# Altium PCB NO2-CO PCB.PcbDoc
Units mil, origin at the board's own origin, x right, y up, seen from the top; angles counter-clockwise.
Board outline 1525 x 1175 mil, 2 copper layers (Top Layer, Bottom Layer); 18 components, 15 nets, 67 pads, 3 vias.
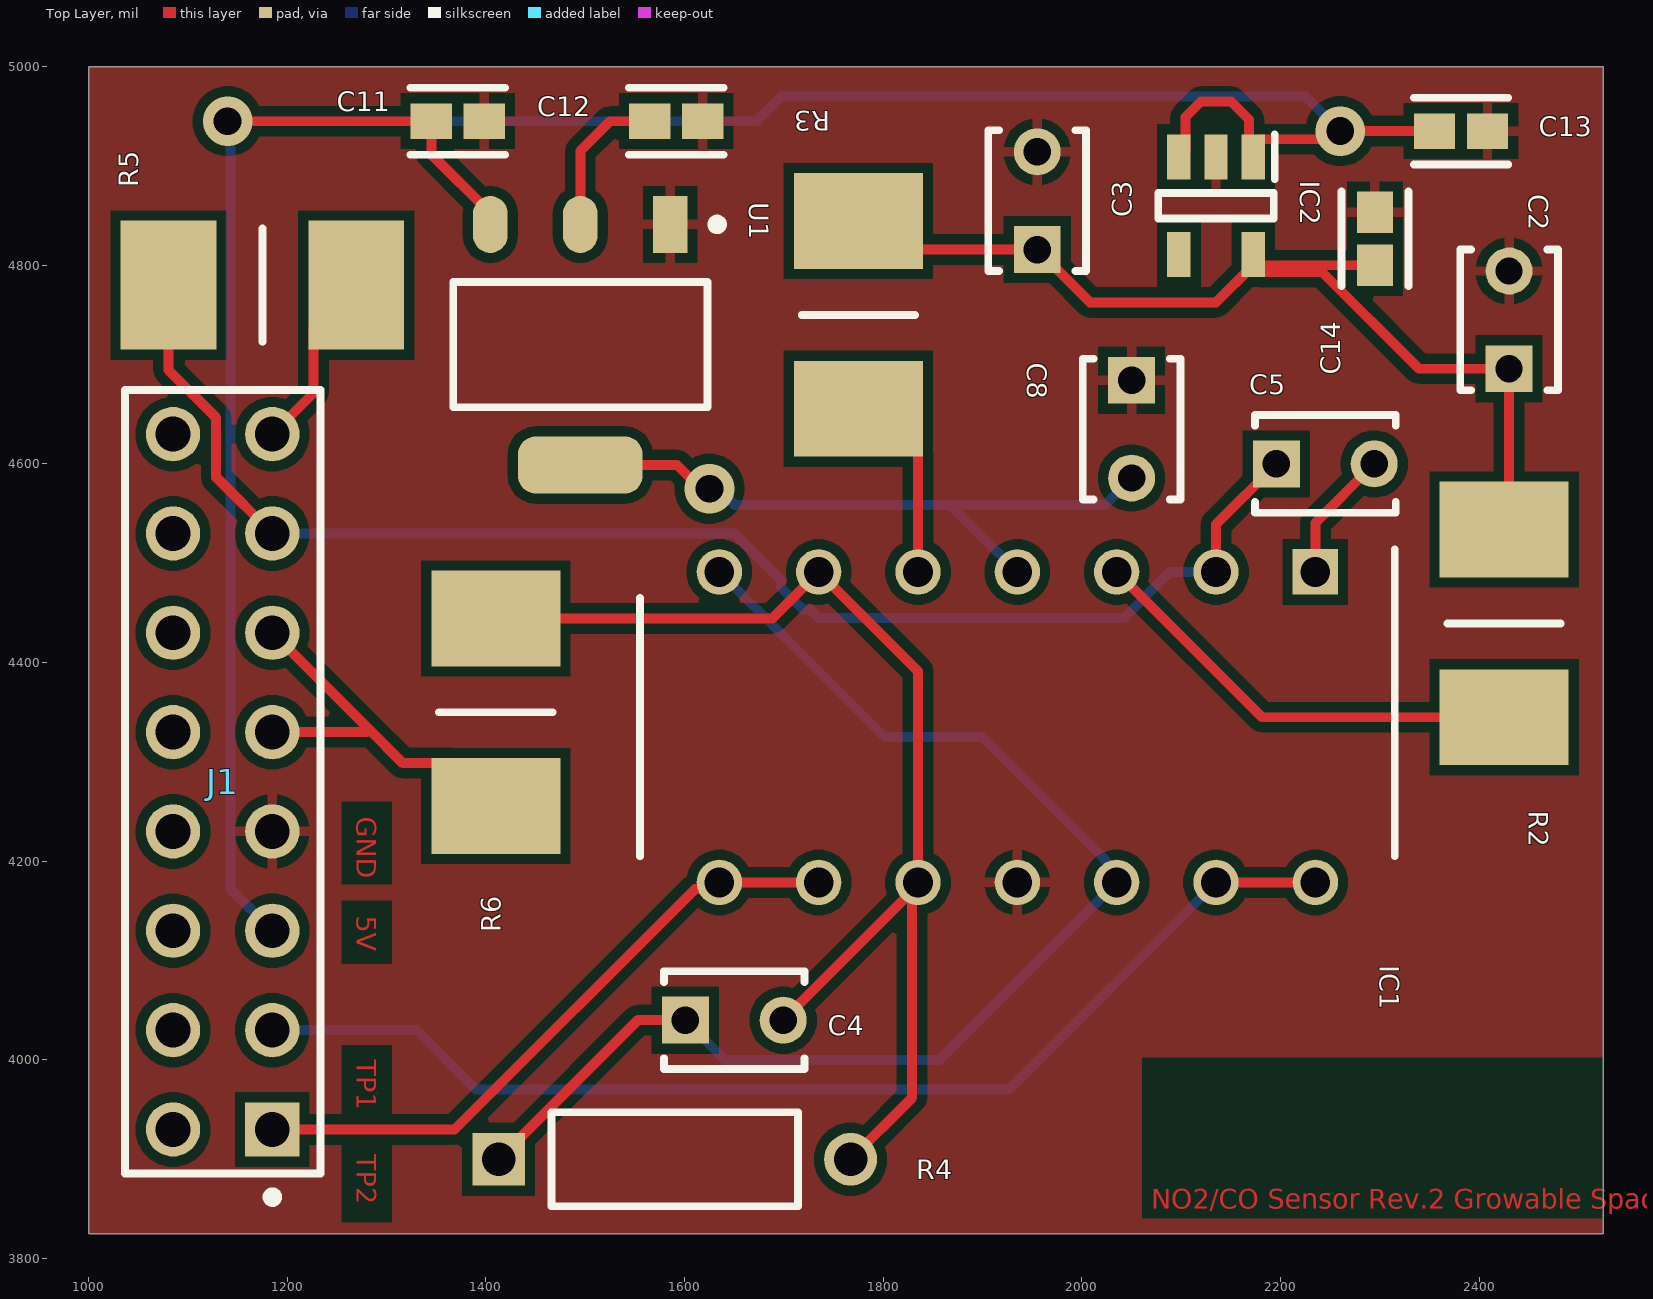
[diagram p0: Top Layer view]
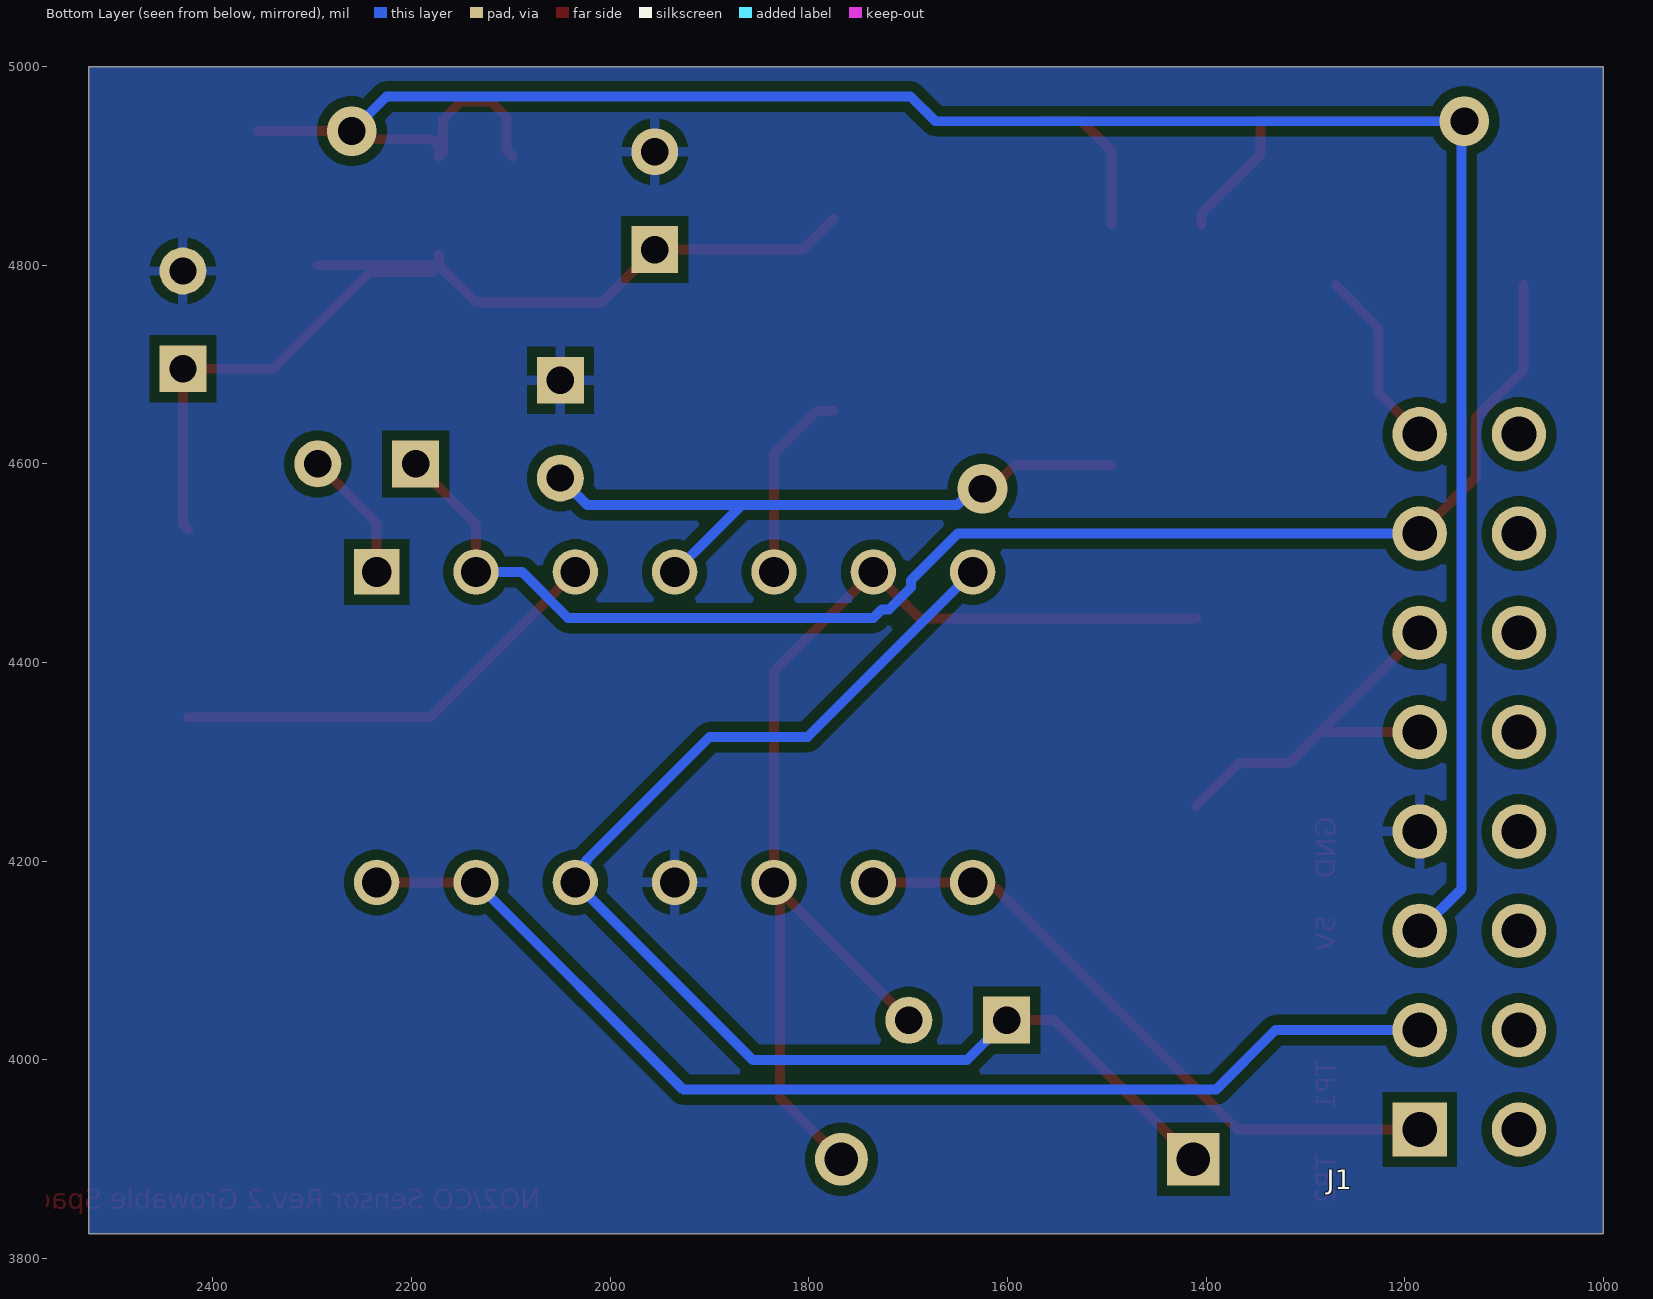
[diagram p1: Bottom Layer view, seen from below]
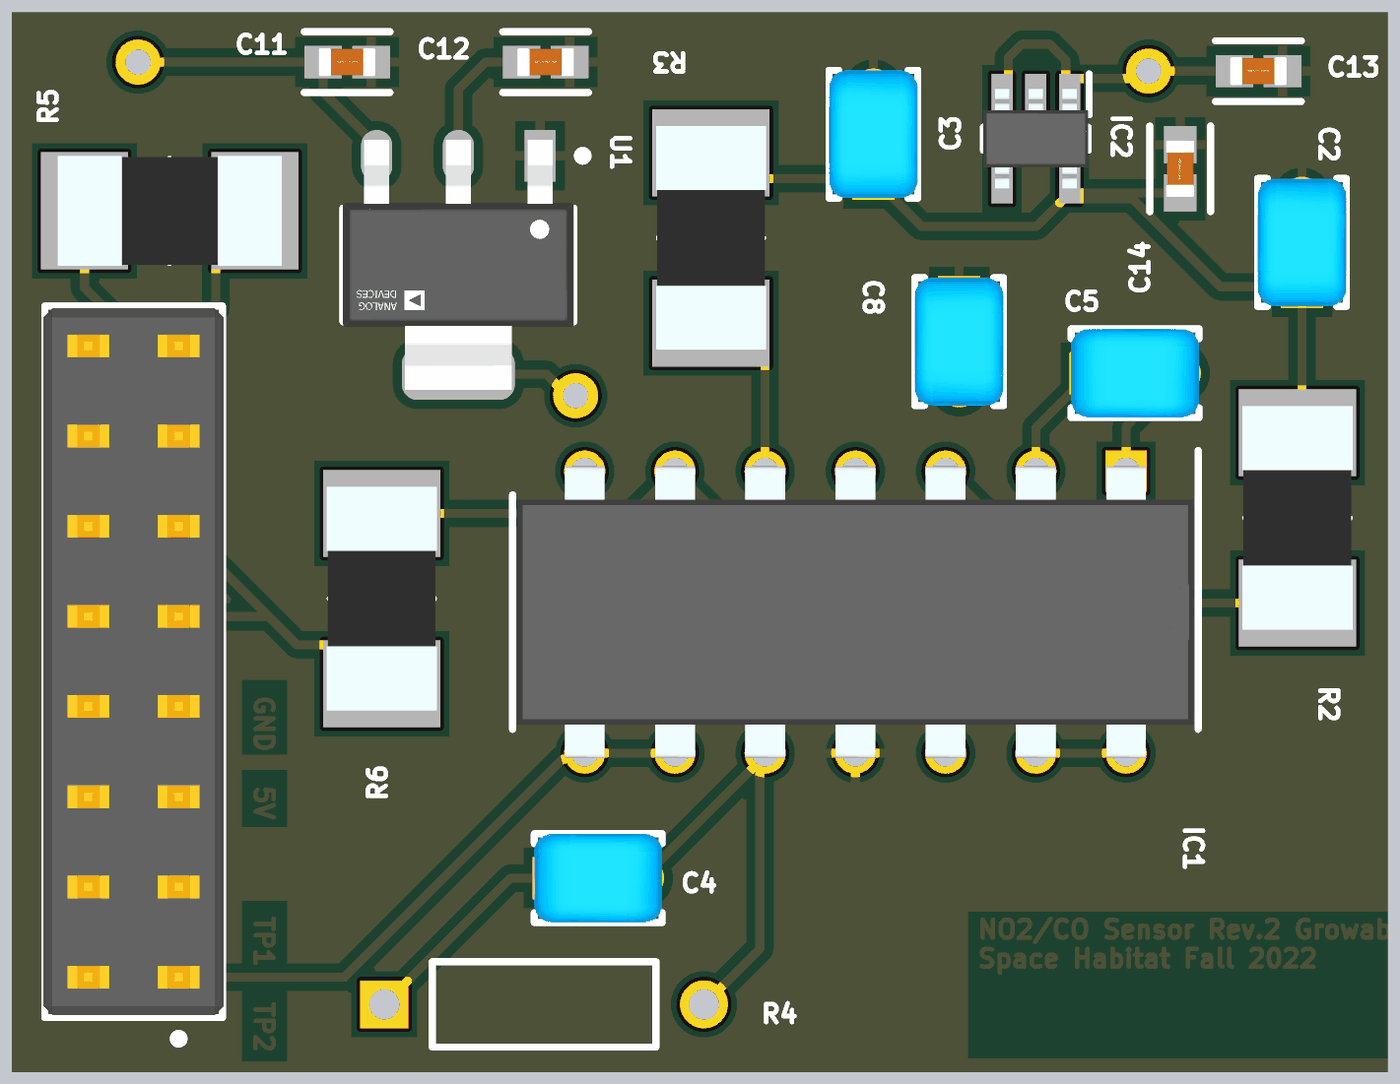
[diagram p2: 3D render of the assembled board from above, using the file's embedded part models]

## Layer stack, top to bottom
Top Solder: solder mask 0.4, Solder Resist, Dk 3.5
Top Layer: signal copper 1.4
Dielectric 1: dielectric 12.6, FR-4, Dk 4.8
Bottom Layer: signal copper 1.4
Bottom Solder: solder mask 0.4, Solder Resist, Dk 3.5

## Board outline
1000,5000 2525,5000 2525,3825 1000,3825

## Design rules (kind name [scope] priority, off if disabled: settings)
Clearance [All] p1: gap=10 ignorepadtopadclearanceinfootprint=FALSE except(0: Arc-Hole Track-Hole SMDPad-Hole THPad-Hole Via-Hole Fill-Hole Poly-Hole Region-Hole Text-Hole)
MinimumSolderMaskSliver [All] p1: minsoldermaskwidth=5
PolygonConnect [All] p1: connectstyle=Relief reliefconductorwidth=10 reliefentries=4 polygonreliefangle="90 Angle" airgapwidth=10
RoutingVias [All] p1: holewidth=28 width=50 viastyle="Through Hole" minholewidth=28 minwidth=50 maxholewidth=28 maxwidth=50
SilkToSilkClearance [All] p1: silktosilkclearance=7.85
SilkToSolderMaskClearance [IsPad] p1: minsilkscreentomaskgap=5 clearancetoexposedcopper=TRUE
SolderMaskExpansion [All] p1: expansion=4 istentingtop=FALSE
Width [All] p1: maxlimit=10 minlimit=10 preferedwidth=10
27 further rules are at their usual default settings.

## Components (designator, comment, footprint, x,y, rotation, side; value= is the part's Value field where it differs from the comment)
C2 ".1uF/100pF" FP-RCE0DB-MFG 2430,4745 r90 top
C3 ".1uF/100pF" FP-RCE0DB-MFG 1955,4865 r90 top
C4 ".1uF/100pF" FP-RCE0DB-MFG 1650,4040 r0 top
C5 ".1uF/100pF" FP-RCE0DB-MFG 2245,4600 r0 top
C8 ".1uF/100pF" FP-RCE0DB-MFG 2050,4635 r270 top
C11 "1uF" FP-0603-L_1_6_0_1-W_0_8_0-IPC_B 1371.66,4945 r0 top
C12 "1uF" FP-0603-L_1_6_0_1-W_0_8_0-IPC_B 1591.66,4945 r0 top
C13 "1uF" FP-0603-L_1_6_0_1-W_0_8_0-IPC_B 2381.66,4935 r0 top
C14 "1uF" FP-0603-L_1_6_0_1-W_0_8_0-IPC_B 2295,4826.66 r90 top
IC1 "MCP6004-I_P" DIP794W56P254L1905H432Q14N 1935,4335 r270 top
IC2 "LD39015M10R" SOT95P280X145-5N 2135,4860 r270 top
J1 "" FP-87227-8-MFG 1135,4280 r90 top
R2 "CRM2512-FX-10R0ELF" RESC6331X80N 2425,4439.49 r270 top
R3 "CRM2512-FX-10R0ELF" RESC6331X80N 1775,4750 r270 top
R4 "100k" RESA60-630X240 1590,3900 r0 top
R5 "CRM2512-FX-10R0ELF" RESC6331X80N 1175,4780 r180 top
R6 "CRM2512-FX-10R0ELF" RESC6331X80N 1410,4350 r90 top
U1 "ADP3339AKCZ-3.3-R7" FP-KC-3-IPC_C 1495,4720 r270 top

## Footprints (in the part's own frame and the unit in brackets; to place one, negate y for a bottom-side part, rotate by r counter-clockwise, add the part's x,y. Pads: shape width x height; smd on the part's side, far side on the other; paste and mask are expansions set on the pad)
DIP794W56P254L1905H432Q14N [mm]
  rect 1.16x1.16 hole 0.76: 1(-3.97,7.62)
  round 1.16 hole 0.76: 2(-3.97,5.08) 3(-3.97,2.54) 4(-3.97,0) 5(-3.97,-2.54) 6(-3.97,-5.08) 7(-3.97,-7.62) 8(3.97,-7.62) 9(3.97,-5.08) 10(3.97,-2.54) 11(3.97,0) 12(3.97,2.54) 13(3.97,5.08) 14(3.97,7.62)
  silkscreen extent -4.55,-9.65 3.3,9.65, body extent -4.11,-9.53 4.11,9.53, height 4.32
FP-0603-L_1_6_0_1-W_0_8_0-IPC_B [mil]
  rect 41.64x35.91 smd paste+0 mask+0: 1(-26.66,0) 2(26.66,0)
  silkscreen extent -47,-34 47,34, body extent -57,-28 57,28, height 10
FP-87227-8-MFG [mil]
  rect 54.69x54.69 hole 35 paste-39370.1 mask+0: 1(-350,-50)
  round 54.69 hole 35 paste-39370.1 mask+0: 2(-350,50) 3(-250,-50) 4(-250,50) 5(-150,-50) 6(-150,50) 7(-50,-50) 8(-50,50) 9(50,-50) 10(50,50) 11(150,-50) 12(150,50) 13(250,-50) 14(250,50) 15(350,-50) 16(350,50)
  silkscreen extent -423,-99 394,99, body extent -398,-102 398,102, height 10
FP-KC-3-IPC_C [mm]
  rect 1.454x0.882 smd paste+0 mask+0: 1(-3.075,2.3)
  rrect100% 1.454x0.882 smd paste+0 mask+0: 2(-3.075,0) 3(-3.075,-2.3)
  rrect61% 1.454x3.182 smd paste+0 mask+0: 4(3.075,0)
  silkscreen extent -3.2,-3.25 1.6,3.63, body extent -3.9,-3.35 3.9,3.35, height 0.25
FP-RCE0DB-MFG [mm]
  rect 1.2x1.2 hole 0.7 paste-1000 mask+0: 1(-1.25,0)
  round 1.2 hole 0.7 paste-1000 mask+0: 2(1.25,0)
  silkscreen extent -1.8,-1.25 1.8,1.25, body extent -1.95,-1.35 1.95,1.35, height 0.25
RESA60-630X240 [mm] "Axial Resistor, 2-Leads, Dia 2.4mm, Body Length 6.3mm"
  rect 1.35x1.35 hole 0.85: 1(-4.5,0)
  round 1.35 hole 0.85: 2(4.5,0)
  silkscreen extent -3.15,-1.2 3.15,1.2, body extent -3.15,-1.2 3.15,1.2, height 2.4
RESC6331X80N [mm]
  rect 2.45x3.3 smd: 1(-2.4,0) 2(2.4,0)
  silkscreen extent 0,-1.45 0,1.45, body extent -3.15,-1.55 3.15,1.55, height 0.8
SOT95P280X145-5N [mm]
  rect 1.15x0.6 smd: 1(-1.25,0.95) 2(-1.25,0) 3(-1.25,-0.95) 4(1.25,-0.95) 5(1.25,0.95)
  silkscreen extent -1.83,-1.48 0.33,1.5, body extent -1.4,-1.48 1.4,1.48, height 1.45

## Part data
C2 C3 C4 C5 C8: library part CMP-06035-022164-1, "Cap Ceramic 100pF 100V C0G ±5% Radial 2.5mm +125°C Ammo Pack", Capacitance=100pF, Case/Package=Radial, Dielectric=C0G, Max Operating Temperature=125°C, Min Operating Temperature=-55°C, Package Quantity=2000, Ratings=AEC-Q200, Resistor Type=Ceramic, Tolerance=5%, Voltage Rating=100V, Height=3.5mm, Height - Seated (Max)=0.138inch, Lead Diameter=0.5mm, Lead Pitch=0.098inch, Lead/Base Style=Straight, Length=0.142inch, Mount="Through Hole", Packaging="Tape and Reel", Termination=Radial, Voltage Rating (DC)=100V, Width=0.098inch
C11 C12 C13 C14: library part CMP-2000-05447-3, "None", Case Code (Imperial)=0603, Case Code (Metric)=1608, Dielectric=X5R, Max Operating Temperature=85°C, Min Operating Temperature=-55°C, Package Quantity=1, Tolerance=10%, Voltage Rating=50V, Capacitance=1uF, Case/Package=0603, Construction=Flat, Contact Plating=Nickel, Depth=0.8mm, Halogen Free="Halogen Free", Height=0.8mm, Length=1.6mm, Mount="Surface Mount", Number of Pins=2, Packaging="Tape and Reel", Radiation Hardening=No, RoHS Compliant=Yes, Series=M, Termination=SMD/SMT, Thickness=0.035inch, Voltage Rating (DC)=50V, Width=0.031inch
IC1: "Integrated Circuit", Arrow Part Number=MCP6004-I/P, Manufacturer_Name=Microchip, Mouser Part Number=579-MCP6004-I/P, Arrow Price/Stock=https://www.arrow.com/en/products/mcp6004-ip/microchip-technology?region=nac, Datasheet Link=http://componentsearchengine.com/Datasheets/1/MCP6004-I_P.pdf, Height=4.32mm, Manufacturer_Part_Number=MCP6004-I/P, Mouser Price/Stock=https://www.mouser.co.uk/ProductDetail/Microchip-Technology-Atmel/MCP6004-I-P?qs=VLwvNDPaIpqIfz2%252Bgie0oA%3D%3D
IC2: "Integrated Circuit", Manufacturer_Name=STMicroelectronics, Mouser Part Number=511-LD39015M10R, Arrow Part Number=LD39015M10R, Arrow Price/Stock=https://www.arrow.com/en/products/ld39015m10r/stmicroelectronics, Datasheet Link=http://www.st.com/web/en/resource/technical/document/datasheet/CD00173477.pdf, Height=1.45mm, Manufacturer_Part_Number=LD39015M10R, Mouser Price/Stock=https://www.mouser.co.uk/ProductDetail/STMicroelectronics/LD39015M10R?qs=wsLAKTqgg6iLO1LS4XmvbQ%3D%3D
J1: library part CMP-03369-000064-1, "CONN HEADER VERT 16POS 2.54MM", Current Rating=3A, Manufacturer="TE Connectivity", Manufacturer Part Number=87227-8, Package=0, Temperature="-65°C to +105°C", Temperature Range High=+105°C, Temperature Range Low=-65°C, Automotive=No, Category=Conn, ComponentLink2Description=Datasheet, ComponentLink2URL=https://www.te.com/usa-en/product-87227-8.datasheet.pdf, Conn Gender=Male, Conn Orientation=Straight, Contact Material=Gold,Nickel, Device Class L1=Connectors, Device Class L2="Headers and Wire Housings", Device Class L3=unset, Digikey Description="CONN HEADER VERT 16POS 2.54MM", Footprint Url=https://www.te.com/commerce/DocumentDelivery/DDEController?Action=showdoc&DocId=Customer+Drawing%7F87227%7FH4%7Fpdf%7FEnglish%7FENG_CD_87227_H4.pdf%7F87227-8, Height=0.428inch, Lead Free=Yes, Mouser Description="Headers & Wire Housings UNSHRD VERT DUAL 16", Number Of Contacts=16, Number Of Rows=2, Octopart=https://octopart.com/87227-8-te+connectivity-39407754, Pitch=2.54mm, RoHS=TRUE
R2: "Resistor", Manufacturer_Name=Bourns, Mouser Part Number=652-CRM2512FX10R0ELF, Supplier Part Number 1=1814402, Arrow Part Number=CRM2512-FX-10R0ELF, Arrow Price/Stock=https://www.arrow.com/en/products/crm2512-fx-10r0elf/bourns, Datasheet Link=http://www.bourns.com/data/global/pdfs/CRM0805_1206_2010.pdf, Height=0.8mm, Manufacturer_Part_Number=CRM2512-FX-10R0ELF, Mouser Price/Stock=https://www.mouser.co.uk/ProductDetail/Bourns/CRM2512-FX-10R0ELF?qs=9fn1gpisni4uwEopCkMdhg%3D%3D, Supplier 1=RSComponents
R3 R5 R6: "Resistor", Manufacturer_Name=Bourns, Mouser Part Number=652-CRM2512FX10R0ELF, Arrow Part Number=CRM2512-FX-10R0ELF, Arrow Price/Stock=https://www.arrow.com/en/products/crm2512-fx-10r0elf/bourns, Datasheet Link=http://www.bourns.com/data/global/pdfs/CRM0805_1206_2010.pdf, Height=0.8mm, Manufacturer_Part_Number=CRM2512-FX-10R0ELF, Mouser Price/Stock=https://www.mouser.co.uk/ProductDetail/Bourns/CRM2512-FX-10R0ELF?qs=9fn1gpisni4uwEopCkMdhg%3D%3D
R4: library part CMP-1659-00073-1, "Axial Resistor, 100 KOhm, +/- 1%, 0.25 W, -55 to 155 degC, 2-Pin THD, RoHS, Bulk", Case\Package=Axial, Max Operating Temperature="155 degC", Min Operating Temperature="-55 degC", Package Quantity=200, Power Rating="250 mW", Resistance="475 Ohm", Tolerance=1%, Voltage Rating="250 V", ComponentLink1Description="Manufacturer URL", ComponentLink1URL=http://www.yageo.com/, ComponentLink2Description=Datasheet, ComponentLink2URL=http://www.yageo.com/documents/recent/Yageo%20LR_MFR_2013.pdf, DatasheetVersion=Apr-13, Length="0.248 inch", Mount="Through Hole", PackageDescription="2-Pin Axial Lead, Dia 2.4 mm, Body Length 6.3 mm", PackageReference=MFR-25, Packaging=Bulk, RoHSCompliant=true
U1: library part CMP-0786-00156-2, "IC REG LINEAR 3.3V 1.5A SOT223-3", Case/Package=SOT-223, Dropout Voltage=230mV, Max Input Voltage=6V, Max Operating Temperature=85°C, Max Output Current=1.5A, Max Output Voltage=5V, Max Supply Current=40mA, Min Input Voltage=2.8V, Min Operating Temperature=-40°C, Min Output Voltage=1.5V, Nominal Output Voltage=3.3V, Output Voltage Accuracy=0.9%, Package Quantity=500, Power Supply Rejection Ratio (PSRR)=88dB, Quiescent Current=130uA, Accuracy=0.9%, Height=1.6mm, Lead Free="Contains Lead", Length=6.5mm, Number of Outputs=1, Number of Pins=3, Number of Regulators=1, Operating Supply Current=40mA, Output Current=1.5A, Output Type=Fixed, Output Voltage=3.3V, Packaging="Tape and Reel", Polarity=Positive, Radiation Hardening=No, REACH SVHC="No SVHC", Width=3.5mm

## Via types
v1: diameter 50, hole 28, Top Layer to Bottom Layer, 3 vias

## Nets (pads, with @x,y where several pads share a name; then routed paths per layer and width w, separated by ;. In a path a pad name is that pad's centre, name@x,y a point inside that pad or via, vN(x,y) a via of type N, cw(c..) or ccw(c..) an arc to the next point about the centre after c; other vN are vias at no path point)
1V: C2.1 C3.1 C14.1 IC2.5 R2.1 R3.1 | length 1038.8
  Top Layer w10: R3.1@1775,4846.46 1805.67,4815.79 C3.1 2008.1,4762.68 2135.13,4762.68 IC2.5@2172.4,4799.96 ; IC2.5 IC2.5@2172.4,4799.96 ; IC2.5@2179.21,4800 C14.1 ; R2.1 2430,4538.98 C2.1 2339.22,4695.79 2241.86,4793.15 2179.21,4793.15 IC2.5@2172.4,4799.96
3V3: C8.2 IC1.4 U1.4 | length 678.1
  Top Layer w10: U1.4 1592.37,4598.94 1616.31,4575 v1(1625,4575)
  Bottom Layer w10: v1(1625,4575) 1634.33,4575 1650.86,4558.48 1867.82,4558.48 ; IC1.4 1897.04,4529.26 1867.82,4558.48 ; C8.2 2022.69,4558.48 1867.82,4558.48
5V: C11.1 C13.1 IC2.1 IC2.3 J1.5 U1.3 | length 2671.8
  Top Layer w10: v1(1140,4945) C11.1 1345,4911.77 1404.45,4852.32 U1.3 ; IC2.3 2104.41,4916.02 2104.41,4949.41 2120,4965 2150,4965 2168.15,4946.85 2168.15,4920.04 2168.15,4913.46 IC2.1 2172.4,4920.04 2179.21,4926.85 2241.03,4926.85 2249.18,4935 v1(2260,4935) C13.1
  Bottom Layer w10: J1.5 1142.66,4172.34 1142.66,4942.34 v1(1140,4945) 1672.5,4945 1697.5,4970 2225,4970 v1(2260,4935)
CE: J1.15 R5.1 | length 185
  Top Layer w10: J1.15 1226.26,4671.26 1226.26,4736.77 R5.1
GND: C2.2 C3.2 C8.1 C11.2 C12.2 C13.2 C14.2 IC1.11 IC2.2 J1.7 U1.1
NetC5_2: C5.2 IC1.1 | length 133.2
  Top Layer w10: IC1.1 2235,4540.79 C5.2
NetC12_1: C12.1 U1.2 | length 156.4
  Top Layer w10: U1.2 1495,4915 1525,4945 C12.1
PIN3: IC1.3 R2.2 | length 450.6
  Top Layer w10: IC1.3 2181.3,4345 R2.2
PIN5: IC1.5 R3.2 | length 196.9
  Top Layer w10: R3.2@1775,4653.54 1791.73,4653.54 1834.96,4610.31 IC1.5 IC1.5
PIN6: C4.2 IC1.6 IC1.10 R4.2 R6.2 | length 1177.7
  Top Layer w10: R6.2 1688.19,4444.49 IC1.6 1835,4391.3 IC1.10 ; C4.2 1829.14,4169.92 1829.14,3961.97 R4.2
PIN7: C4.1 IC1.7 IC1.12 R4.1 | length 1306.8
  Top Layer w10: R4.1 1552.83,4040 C4.1
  Bottom Layer w10: C4.1 1640.79,4000 1856.3,4000 IC1.12 2035,4188.35 2023.9,4199.46 2023.9,4201.1 1900,4325 1801.3,4325 IC1.7
RE: C5.1 IC1.2 J1.13 R5.2 | length 1435.8
  Top Layer w10: R5.2 1080.51,4694.37 1128.48,4646.4 1128.48,4586.52 J1.13 ; IC1.2 2135,4539.21 C5.1
  Bottom Layer w10: J1.13 1650,4530 1697.17,4482.83 1697.17,4475.63 1719.33,4453.46 1726.54,4453.46 1735,4445 2042.21,4445 2088.51,4491.3 IC1.2
TP1: IC1.13 IC1.14 J1.3 | length 1164.9
  Top Layer w10: IC1.13 IC1.14
  Bottom Layer w10: J1.3 1330,4030 1390,3970 1926.3,3970 IC1.13@2137.56,4181.26
TP2: IC1.8 IC1.9 J1.1 | length 653
  Top Layer w10: J1.1 1368.47,3930 1610.35,4171.88 1628.17,4171.88 IC1.8 IC1.9
WE: J1.9 J1.11 R6.1 | length 395.8
  Top Layer w10: J1.9 1280,4330 1282.5,4332.5 ; J1.11 1282.5,4332.5 ; R6.1 1366.77,4298.74 1316.26,4298.74 1282.5,4332.5
pads on no net: IC2.4 J1.2 J1.4 J1.6 J1.8 J1.10 J1.12 J1.14 J1.16

## Polygon pours and split planes (outlines as drawn)
GND on Bottom Layer "2-GND" (solid, pour order 1): 1000,5000 2525,5000 2525,3825 1000,3825
GND on Top Layer "2-GND" (solid, pour order 0): 1000,5000 2525,5000 2525,3825 1000,3825

## Other copper
Top Layer:
  text "GND" at 1270,4245 h20 r270
  text "5V" at 1270,4145 h20 r270
  text "TP1" at 1270,4000 h20 r270
  text "TP2" at 1270,3905 h20 r270
  text "NO2/CO Sensor Rev.2 Growable Space Habitat Fall 2022" at 2070,3850 h20